# Allegro board SEQUENTIALTIMER.brd
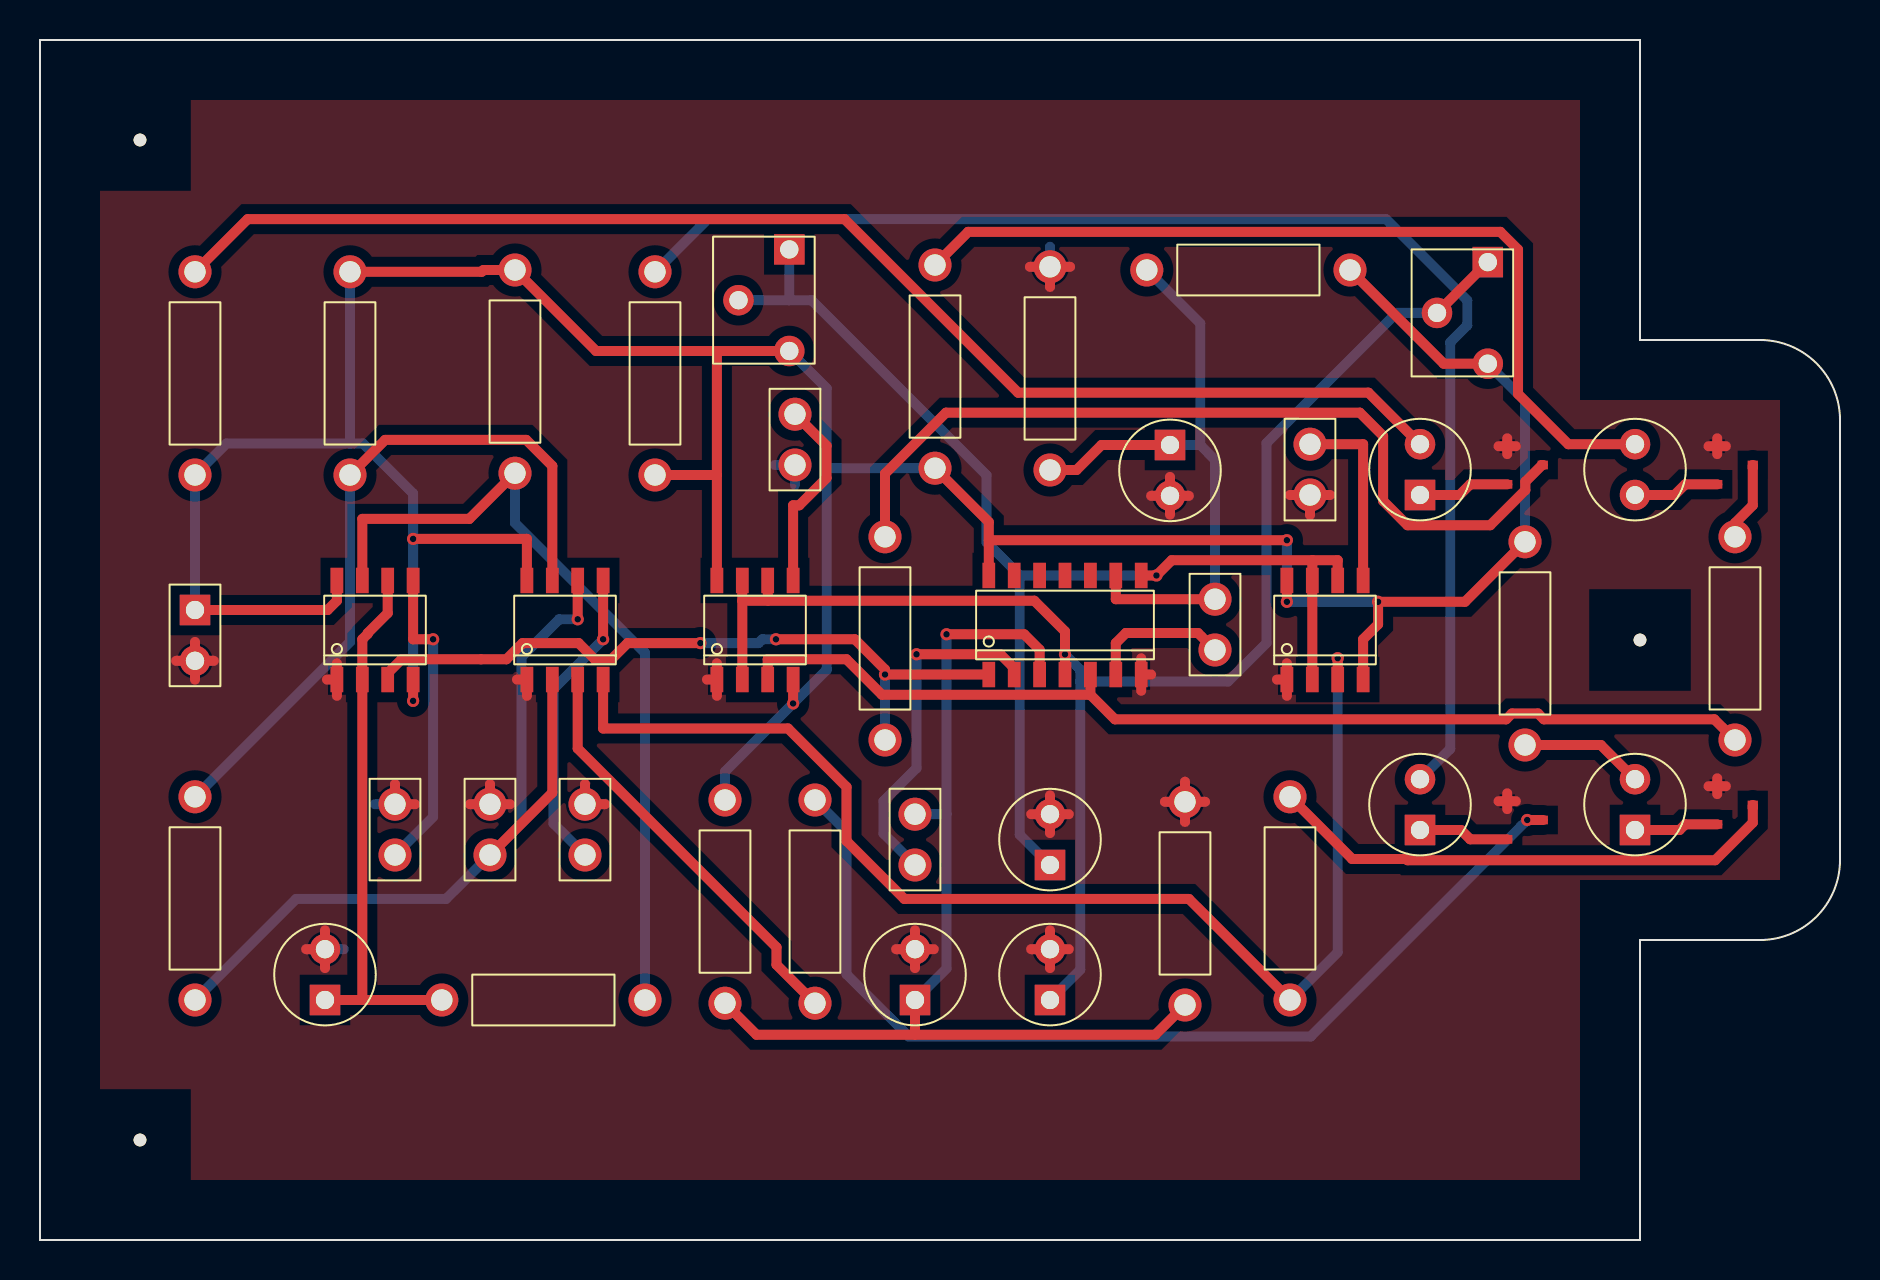
[diagram p0: board, top side]
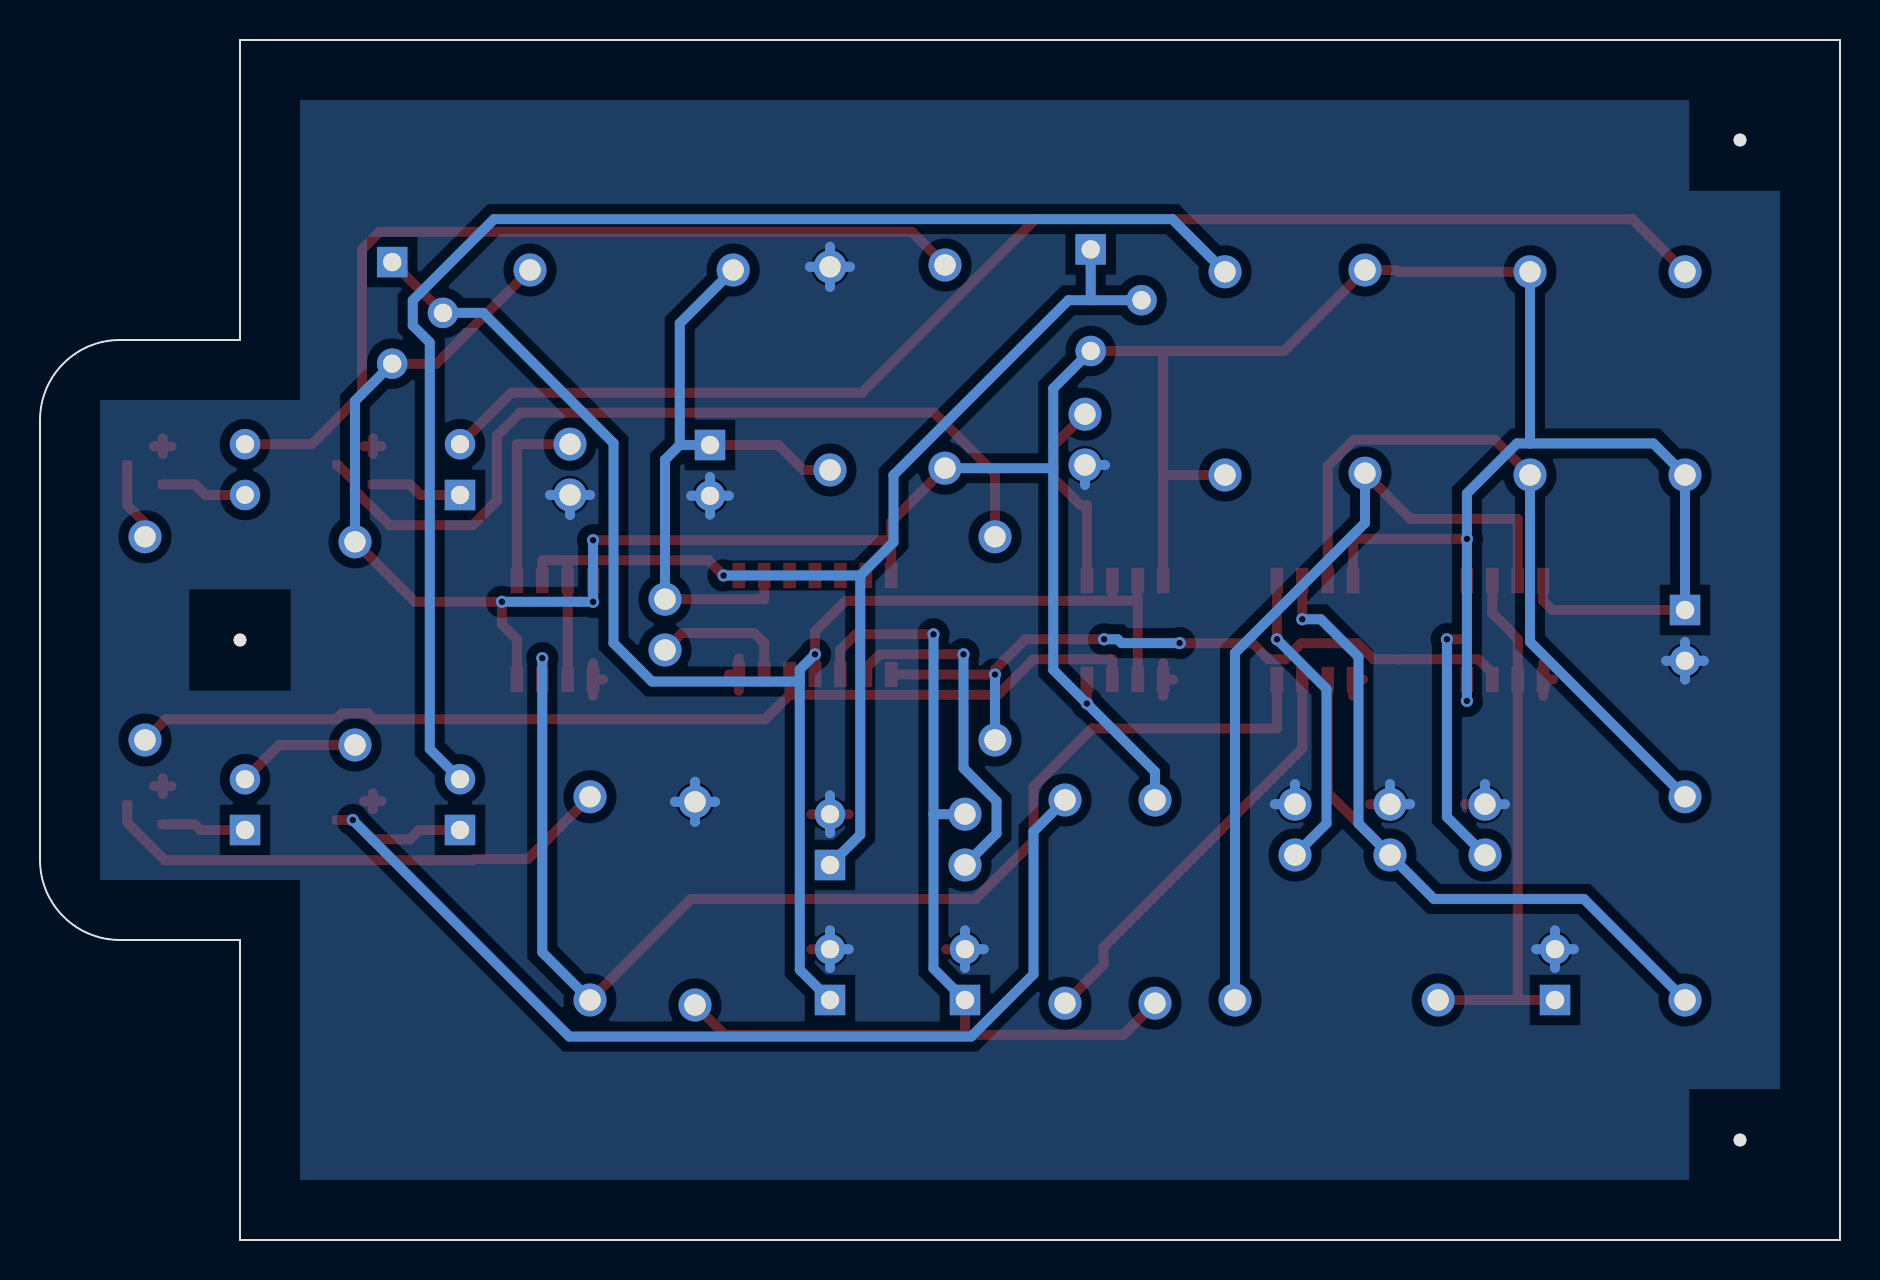
[diagram p1: board, bottom side, seen from below]

Outline 90 x 60 mm; copper layers: TOP, BOTTOM. Coordinates in mm from the lower left corner of the outline.
Outline path: 0,60 0,0 80,0 80,15 86,15 arc(88.83,16.17) 90,19 90,41 arc(88.83,43.83) 86,45 80,45 80,60 0,60

## Placement (name value [footprint] x y rotation side)
C1  4.7u  [CAP196]  14.25 12 0 top
C2  0.047u  [CAPCK05]  22.5 19.25 0 top
C3  0.01u  [CAPCK05]  27.25 19.25 0 top
C4  0.01u  [CAPCK05]  17.75 19.25 0 top
C5  0.047u  [CAPCK05]  43.75 18.75 0 top
C6  2.2u  [CAP196]  50.5 12 0 top
C7  0.01u  [CAPCK05]  37.75 38.75 0 top
C8  0.047u  [CAPCK05]  58.75 29.5 0 top
C9  2.2u  [CAP196]  50.5 18.75 0 top
C10  0.01u  [CAPCK05]  63.5 37.25 0 top
D1  LED  [CAP196]  69 37.25 0 top
D2  LED  [CAP196]  69 20.5 0 top
D3  LED  [CAP196#2]  79.75 37.25 0 top
D4  LED  [CAP196]  43.75 12 0 top
D5  LED  [CAP196]  79.75 20.5 0 top
D6  LED  [CAP196]  56.5 39.75 180 top
J1  CON2  [JUMPER2]  7.75 31.5 270 top
NOREF  -  []  80 45 0 top
NOREF#2  -  []  0 0 90 top
NOREF#3  -  [unnamed#2]  5 55 0 top
NOREF#4  -  []  0 60 0 top
NOREF#5  -  [unnamed#2]  80 30 0 top
NOREF#6  -  []  90 19 90 top
NOREF#7  -  [unnamed#2]  5 5 0 top
NOREF#8  -  []  89 43.65 0 top
Q1  2SC1130  [SOT23]  74.25 38.75 0 top
Q2  2SC1130  [SOT23]  74.25 21 0 top
Q3  2SC1130  [SOT23]  84.75 38.75 0 top
Q4  2SC1130  [SOT23]  84.75 21.75 0 top
R1  330  [RES400]  7.75 38.25 0 top
R2  10k  [RES400]  15.5 38.25 0 top
R3  330  [RES400]  30.75 38.25 0 top
R4  10k  [RES400]  23.75 48.5 180 top
R5  1M  [RES400]  30.25 12 90 top
R6  100  [RES400]  42.25 25 0 top
R7  100  [RES400]  38.75 22 180 top
R8  470k  [RES400]  7.75 12 0 top
R9  470k  [RES400]  34.25 22 180 top
R10  330  [RES400]  44.75 48.75 180 top
R11  3.3k  [RES400]  84.75 25 0 top
R12  100  [RES400]  57.25 11.75 0 top
R13  470k  [RES400]  65.5 48.5 90 top
R14  330  [RES400]  74.25 24.75 0 top
R15  3.3k  [RES400]  62.5 12 0 top
R16  100  [RES400]  50.5 38.5 0 top
U1  NE555  [SOIC8]  16.75 30.5 90 top
U2  NE555  [SOIC8]  26.25 30.5 90 top
U3  NE555  [SOIC8]  35.75 30.5 90 top
U4  74LS04  [SOIC14]  51.25 30.75 90 top
U5  NE555  [SOIC8]  64.25 30.5 90 top
VR1  1M  [RESADJ]  72.39 48.9 0 top
VR2  1M  [RESADJ]  37.47 49.53 0 top

## Library data of the parts
C1 C6 C9 = C: Tolerance: ***; User Part Number: ***
C2-C5 C7 C8 C10 = CAP NP: Tolerance: ***; User Part Number: ***
D1-D6 = LED: Tolerance: ***; User Part Number: ***
J1 = CON2: User Part Number: ***
Q1-Q4 = 2SC1130_0
R1-R16 = R: Tolerance: ***; User Part Number: ***
U1 = NE555_1: Tolerance: ***; User Part Number: ***
U2 = NE555_2: Tolerance: ***; User Part Number: ***
U3 U5 = NE555_3: Tolerance: ***; User Part Number: ***
U4 = 74LS04: Tolerance: ***; User Part Number: ***
VR1 VR2 = RESISTOR VAR: Tolerance: ***; User Part Number: ***

## Footprints (pads in the part's own frame, mm; a bottom-side part is the same pattern mirrored in y, then rotated)
CAP196
  rect 1.524x1.524 hole 0.914: 1(0,0)
  round 1.524 hole 0.914: 2(0,2.54)
CAP196#2
  round 1.524 hole 0.889: 1(0,0)
  round 1.524 hole 0.914: 2(0,2.54)
CAPCK05
  round 1.651 hole 1.067: 1(0,0) 2(0,2.54)
JUMPER2
  rect 1.524x1.524 hole 0.914: 1(0,0)
  round 1.524 hole 0.914: 2(2.54,0)
RES400
  round 1.651 hole 1.067: 1(0,0) 2(0,10.16)
RESADJ
  rect 1.524x1.524 hole 0.914: 1(0,0)
  round 1.524 hole 0.914: 2(-2.54,-2.54) 3(0,-5.08)
SOIC8
  rect 1.27x0.635 smd: 1(-2.477,1.905) 2(-2.477,0.635) 3(-2.477,-0.635) 4(-2.477,-1.905) 5(2.477,-1.905) 6(2.477,-0.635) 7(2.477,0.635) 8(2.477,1.905)
SOIC14
  rect 1.27x0.635 smd: 1(-2.477,3.81) 2(-2.477,2.54) 3(-2.477,1.27) 4(-2.477,0) 5(-2.477,-1.27) 6(-2.477,-2.54) 7(-2.477,-3.81) 8(2.477,-3.81) 9(2.477,-2.54) 10(2.477,-1.27) 11(2.477,0) 12(2.477,1.27) 13(2.477,2.54) 14(2.477,3.81)
SOT23
  rect 0.508x0.432 smd: 1(-0.889,0.94) 2(-0.889,-0.965) 3(0.889,0)
unnamed#2
  round 0.635 hole 3.175 unplated: (0,0)

## Nets
GND: C1.2 C2.2 C3.2 C4.2 C6.2 C7.1 C9.2 C10.1 D4.2(ANODE) D6.2(ANODE) J1.2 Q1.1(E) Q2.1(E) Q3.1(E) Q4.1(E) R12.2 R16.2 U1.1(GND) U2.1(GND) U3.1(GND) U4.7 U5.1(GND)
VCC: J1.1 R1.1 R2.2 R3.1 R4.1 R9.1 R10.2 R13.1 R14.2 U1.4(RST) U1.8(VCC) U2.8(VCC) U3.4(RST) U3.8(VCC) U4.14 U5.4(RST) U5.8(VCC) VR1.3(B) VR2.3(B)
N00439_MV1: C5.1 U4.2(O)
N00439_MV2: C8.1 U4.6(O)
N00454_MV1: C5.2 D4.1(CATHODE) R9.2 R12.1 U4.3(I)
N00454_MV2: C8.2 D6.1(CATHODE) R13.2 R16.1 U4.9(I)
N00508_MV1: C6.1 U3.2(TRG) U3.6(THR) U3.7(DSCHG) U4.4(O) VR1.1(A) VR1.2(WIPER)
N00508_MV2: C9.1 U4.8(O) U5.2(TRG) U5.6(THR) U5.7(DSCHG) VR2.1(A) VR2.2(WIPER)
N00841_MV1: C7.2 U3.5(CV)
N00841_MV2: C10.2 U5.5(CV)
N00902_MV1: D3.2(ANODE) R10.1
N00902_MV2: D5.2(ANODE) R14.1
N00906_MV1: D3.1(CATHODE) Q3.2(C)
N00906_MV2: D5.1(CATHODE) Q4.2(C)
N00914_MV1: Q3.3(B) R11.2
N00914_MV2: Q4.3(B) R15.2
N00612: C1.1 R5.2 U1.2(TRG) U1.6(THR)
N00616: R4.2 R5.1 U1.7(DSCHG)
N00691: C4.1 U1.5(CV)
N00764: D1.2(ANODE) R1.2
N00768: D1.1(CATHODE) Q1.2(C)
N00772: Q1.3(B) R6.2
N00776: R6.1 U1.3(OUT) U4.1(I)
N00874: R11.1 U3.3(OUT) U4.5(I)
N01142: R15.1 U2.4(RST) U5.3(OUT)
N01146: C2.1 R8.1 U2.2(TRG) U2.6(THR)
N01168: R2.1 R8.2 U2.7(DSCHG)
N01300: C3.1 U2.5(CV)
N01373: D2.2(ANODE) R3.2
N01377: D2.1(CATHODE) Q2.2(C)
N01381: R7.2 U2.3(OUT)
N01385: Q2.3(B) R7.1

Pads without a net: U4 10 11 12 13

## Via types
v1: diameter 0.61, hole 0.33, TOP to BOTTOM, 18 vias

## Routing (per net, layer and track width the routed paths; a pad name or vN(x,y) marks a point on that pad's centre or on a via; arc(x,y) is an arc through that point)
GND: length 92.9
  TOP w0.5: Q1.1 73.79,39.69 ; Q1.1 73.36,39.3 ; Q1.1 72.93,39.69 ; Q1.1 73.36,40.08 ; 42.81,14.54 D4.2 ; D4.2 43.75,15.48 ; D4.2 44.69,14.54 ; D4.2 43.75,13.6 ; J1.2 8.69,28.96 ; J1.2 7.75,28.02 ; J1.2 7.75,29.9 ; J1.2 6.81,28.96 ; D6.2 57.44,37.21 ; D6.2 56.5,36.27 ; D6.2 55.56,37.21 ; D6.2 56.5,38.15 ; 73.36,21.55 Q2.1 ; Q2.1 73.36,22.33 ; Q2.1 73.79,21.94 ; Q2.1 72.93,21.94 ; C6.2 50.5,15.48 ; C6.2 49.56,14.54 ; C6.2 50.5,13.6 ; C6.2 51.44,14.54 ; U4.7 55.06,29.09 ; U4.7 55.06,27.46 ; U4.7 55.56,28.27 ; 61.85,28.02 U5.1 ; U5.1 62.34,28.84 ; U5.1 62.34,27.21 ; 62.5,37.25 C10.1 ; C10.1 64.5,37.25 ; C10.1 63.5,36.25 ; 14.35,28.02 U1.1 ; U1.1 14.85,28.84 ; U1.1 14.85,27.21 ; 57.25,20.91 R12.2 ; R12.2 57.25,22.91 ; R12.2 56.25,21.91 ; R12.2 58.25,21.91 ; 28.25,21.79 C3.2 27.25,22.79 ; 83.43,39.69 Q3.1 ; Q3.1 83.86,39.3 ; Q3.1 84.29,39.69 ; Q3.1 83.86,40.08 ; C9.2 50.5,22.23 ; C9.2 50.5,20.35 ; C9.2 51.44,21.29 ; C9.2 49.56,21.29 ; U3.1 33.84,28.84 ; U3.1 33.84,27.21 ; U3.1 33.35,28.02 ; 83.43,22.69 Q4.1 ; Q4.1 83.86,23.08 ; Q4.1 83.86,22.3 ; Q4.1 84.29,22.69 ; C1.2 14.25,15.48 ; C1.2 13.31,14.54 ; C1.2 14.25,13.6 ; 49.5,48.66 R16.2 ; R16.2 51.5,48.66 ; R16.2 50.5,47.66 ; 24.34,27.21 U2.1 23.85,28.02 ; C2.2 23.5,21.79 ; C2.2 22.5,22.79 ; C2.2 21.5,21.79 ; 18.75,21.79 C4.2 17.75,22.79
  BOTTOM w0.5: R12.2 58.25,21.91 ; R12.2 57.25,22.91 ; R12.2 57.25,20.91 ; R12.2 56.25,21.91 ; 22.5,22.79 C2.2 21.5,21.79 ; 49.56,14.54 C6.2 ; C6.2 50.5,13.6 ; C6.2 50.5,15.48 ; 6.81,28.96 J1.2 ; J1.2 7.75,29.9 ; J1.2 8.69,28.96 ; J1.2 7.75,28.02 ; 14.25,13.6 C1.2 ; C1.2 15.19,14.54 ; C1.2 13.31,14.54 ; C1.2 14.25,15.48 ; 50.5,22.23 C9.2 50.5,20.35 ; 27.25,22.79 C3.2 28.25,21.79 ; 42.81,14.54 D4.2 ; D4.2 43.75,15.48 ; D4.2 43.75,13.6 ; R16.2 50.5,49.66 ; R16.2 51.5,48.66 ; R16.2 50.5,47.66 ; R16.2 49.5,48.66 ; 37.75,37.75 C7.1 36.75,38.75 ; 55.56,37.21 D6.2 ; D6.2 57.44,37.21 ; D6.2 56.5,36.27 ; D6.2 56.5,38.15 ; C10.1 64.5,37.25 ; C10.1 62.5,37.25 ; C10.1 63.5,36.25 ; 16.75,21.79 C4.2 17.75,22.79
VCC: length 187
  TOP w0.5: 47.44,34.99 v1(62.34,34.99) ; 47.44,34.99 47.44,35.9 R10.2 ; 47.44,34.99 U4.14 ; R2.2 22.08,48.41 22.17,48.5 R4.1 27.8,44.45 33.84,44.45 ; U1.4 v1(18.66,26.96) ; U5.8 v1(62.34,31.91) ; U3.4 v1(37.66,26.83) ; 33.84,44.45 VR2.3 ; 33.84,44.45 33.84,38.25 ; U5.4 66.16,30.04 66.9,30.78 v1(66.9,31.91) 71.25,31.91 R14.2 ; v1(18.66,35.06) 24.34,35.06 U2.8 ; 33.84,38.25 U3.8 ; 33.84,38.25 R3.1 ; J1.1 14.38,31.5 14.85,31.96 U1.8 ; R13.1 70.19,43.81 VR1.3
  BOTTOM w0.5: v1(62.34,34.99) v1(62.34,31.91) 63.03,31.91 v1(66.9,31.91) ; 39.34,38.59 39.34,42.58 VR2.3 ; 39.34,38.59 39.34,28.51 v1(37.66,26.83) 34.25,23.42 R9.1 ; 39.34,38.59 R10.2 ; 15.5,39.83 R2.2 ; 15.5,39.83 9.33,39.83 R1.1 J1.1 ; 15.5,39.83 16.15,39.83 18.66,37.32 v1(18.66,35.06) v1(18.66,26.96) ; R14.2 74.25,41.95 VR1.3
N00439_MV1: length 17.4
  TOP w0.5: v1(43.83,29.29) 48.02,29.29 48.71,28.59 U4.2
  BOTTOM w0.5: C5.1 42.17,20.33 42.17,21.94 43.83,23.59 v1(43.83,29.29)
N00439_MV2: length 7.1
  TOP w0.5: C8.1 57.9,30.35 54.3,30.35 53.79,29.84 U4.6
N00454_MV1: length 52.7
  TOP w0.5: v1(45.33,30.29) 49.21,30.29 49.98,29.52 U4.3 ; 43.75,10.26 35.83,10.26 R9.2 ; 43.75,10.26 55.76,10.26 R12.1 ; 43.75,10.26 D4.1
  BOTTOM w0.5: D4.1 45.33,13.58 45.33,21.29 ; 45.33,21.29 C5.2 ; 45.33,21.29 v1(45.33,30.29)
N00454_MV2: length 32
  TOP w0.5: U4.9 53.79,32.04 C8.2 ; D6.1 53.08,39.75 51.83,38.5 R16.1
  BOTTOM w0.5: R13.2 58.01,45.83 58.01,39.75 ; 58.01,39.75 58.75,39.01 C8.2 ; 58.01,39.75 D6.1
N00508_MV1: length 78
  TOP w0.5: 35.12,31.96 U3.2 ; 35.12,31.96 36.38,31.96 ; 35.12,31.96 U3.7 ; 36.38,31.96 49.72,31.96 51.25,30.43 v1(51.25,29.29) U4.4 ; 36.38,31.96 U3.6 ; VR1.1 VR1.2
  BOTTOM w0.5: 52.01,27.92 59.4,27.92 61.33,29.85 61.33,39.84 67.84,46.35 VR1.2 ; 52.01,27.92 52.01,28.52 v1(51.25,29.29) ; 52.01,27.92 52.01,13.51 C6.1
N00508_MV2: length 63.3
  TOP w0.5: U5.6 64.89,33.99 63.62,33.99 ; 63.62,33.99 56.58,33.99 v1(55.82,33.23) U4.8 ; 63.62,33.99 U5.7 U5.2
  BOTTOM w0.5: 37.47,46.99 38.58,46.99 47.33,38.24 47.33,34.89 48.99,33.23 ; 37.47,46.99 VR2.1 ; 37.47,46.99 34.92,46.99 ; 48.99,33.23 v1(55.82,33.23) ; 48.99,33.23 48.99,20.26 C9.1
N00841_MV1: length 9.8
  TOP w0.5: C7.2 39.33,39.71 39.33,38.1 37.96,36.74 37.66,36.74 U3.5
N00841_MV2: length 9.5
  TOP w0.5: U5.5 66.16,39.79 C10.2
N00902_MV1: length 44.3
  TOP w0.5: D3.2 76.41,39.79 73.9,42.3 73.9,49.52 73.02,50.41 46.41,50.41 R10.1
N00902_MV2: length 6.2
  TOP w0.5: D5.2 78.04,24.75 R14.1
N00906_MV1: length 4.3
  TOP w0.5: Q3.2 82.26,37.78 81.73,37.25 D3.1
N00906_MV2: length 4.2
  TOP w0.5: Q4.2 82.26,20.78 81.98,20.5 D5.1
N00914_MV1: length 4
  TOP w0.5: R11.2 84.75,35.85 85.64,36.74 Q3.3
N00914_MV2: length 26.1
  TOP w0.5: Q4.3 85.64,20.87 83.76,18.99 68.37,18.99 68.31,19.05 65.61,19.05 R15.2
N00612: length 27.3
  TOP w0.5: 16.11,12 U1.2 16.11,30.04 16.39,30.31 16.39,30.34 17.39,31.34 U1.6 ; 16.11,12 C1.1 ; 16.11,12 R5.2
N00616: length 40.7
  TOP w0.5: U1.7 16.11,36.06 21.47,36.06 R4.2
  BOTTOM w0.5: R4.2 23.75,35.85 30.25,29.35 R5.1
N00691: length 15.5
  TOP w0.5: U1.5 18.66,30.04 v1(19.66,30.04)
  BOTTOM w0.5: C4.1 19.66,21.16 v1(19.66,30.04)
N00764: length 67
  TOP w0.5: D1.2 66.42,42.37 48.91,42.37 40.23,51.04 10.38,51.04 R1.2
N00768: length 4.6
  TOP w0.5: Q1.2 71.51,37.78 70.98,37.25 D1.1
N00772: length 43
  TOP w0.5: Q1.3 75.1,38.75 74.27,37.92 74.27,37.49 72.51,35.74 68.37,35.74 67.16,36.96 67.16,40.2 65.99,41.37 45.3,41.37 42.25,38.32 R6.2
N00776: length 35.9
  TOP w0.5: U1.3 17.39,28.34 18.08,29.04 22.05,29.04 22.05,29.04 23.32,29.04 24.13,29.84 26.93,29.84 27.74,29.04 28.57,29.04 29.38,29.84 v1(33.02,29.84) ; v1(36.8,30.04) 40.74,30.04 42.25,28.53 v1(42.25,28.27) U4.1
  BOTTOM w0.5: v1(33.02,29.84) 35.92,29.84 36.12,30.04 v1(36.8,30.04) ; R6.1 v1(42.25,28.27)
N00874: length 52.3
  TOP w0.5: 52.52,27.26 U4.5 ; 52.52,27.26 42.1,27.26 40.33,29.04 36.38,29.04 U3.3 ; 52.52,27.26 53.75,26.04 73.31,26.04 73.6,26.33 74.9,26.33 75.19,26.04 83.72,26.04 R11.1
N01142: length 63.1
  TOP w0.5: U5.3 v1(64.89,29.09) ; U2.4 28.16,25.58 37.4,25.58 40.33,22.65 40.33,19.95 43.22,17.05 57.45,17.05 R15.1
  BOTTOM w0.5: R15.1 64.89,14.38 v1(64.89,29.09)
N01146: length 43.9
  TOP w0.5: C2.1 25.61,22.36 U2.2 ; U2.6 v1(26.89,31.04)
  BOTTOM w0.5: R8.1 12.8,17.05 20.3,17.05 C2.1 24.08,20.83 24.08,29.16 25.96,31.04 v1(26.89,31.04)
N01168: length 36.4
  TOP w0.5: R2.1 17.25,40.01 24.31,40.01 25.61,38.7 U2.7
  BOTTOM w0.5: R2.1 15.5,29.91 R8.2
N01300: length 15.4
  TOP w0.5: U2.5 v1(28.16,30.04)
  BOTTOM w0.5: C3.1 25.67,20.83 25.67,27.55 v1(28.16,30.04)
N01373: length 68.3
  BOTTOM w0.5: D2.2 70.51,24.55 70.51,44.88 71.36,45.73 71.36,46.98 67.3,51.04 33.38,51.04 R3.2
N01377: length 4.6
  TOP w0.5: Q2.2 71.51,20.03 71.05,20.5 D2.1
N01381: length 21.1
  TOP w0.5: U2.3 26.89,24.58 36.83,14.63 36.83,13.76 R7.2
N01385: length 50
  TOP w0.5: Q2.3 v1(74.36,21)
  BOTTOM w0.5: R7.1 40.33,20.42 40.33,13.29 43.44,10.17 63.54,10.17 v1(74.36,21)

## Copper pours and planes (outline as drawn; the poured copper is in the pictures)
GND on TOP: 3,3 77,3 77,18 87,18 87,42 77,42 77,57 3,57 ; 11 cut-outs
GND on BOTTOM: 3,3 77,3 77,18 87,18 87,42 77,42 77,57 3,57 ; 1 cut-out

## Text on the board
DIMENSION: FIGURE | SIZE | 0.3302 | 0.889 | 0.9144 | 1.0668 | 3.175 | DRILL CHART: TOP to BOTTOM | ALL UNITS ARE IN MILLIMETERS | PLATED | NON-PLATED | QTY | 18 | 1 | 25 | 46 | 3
